# Altium PCB SolarPanelCharger.PcbDoc
Units mm, origin at the board's own origin, x right, y up, seen from the top; angles counter-clockwise.
Board outline 34.31 x 20.32 mm, 2 copper layers (Top Layer, Bottom Layer); 24 components, 17 nets, 61 pads, 39 vias.
Unrouted connection lines stored in the file: 1.
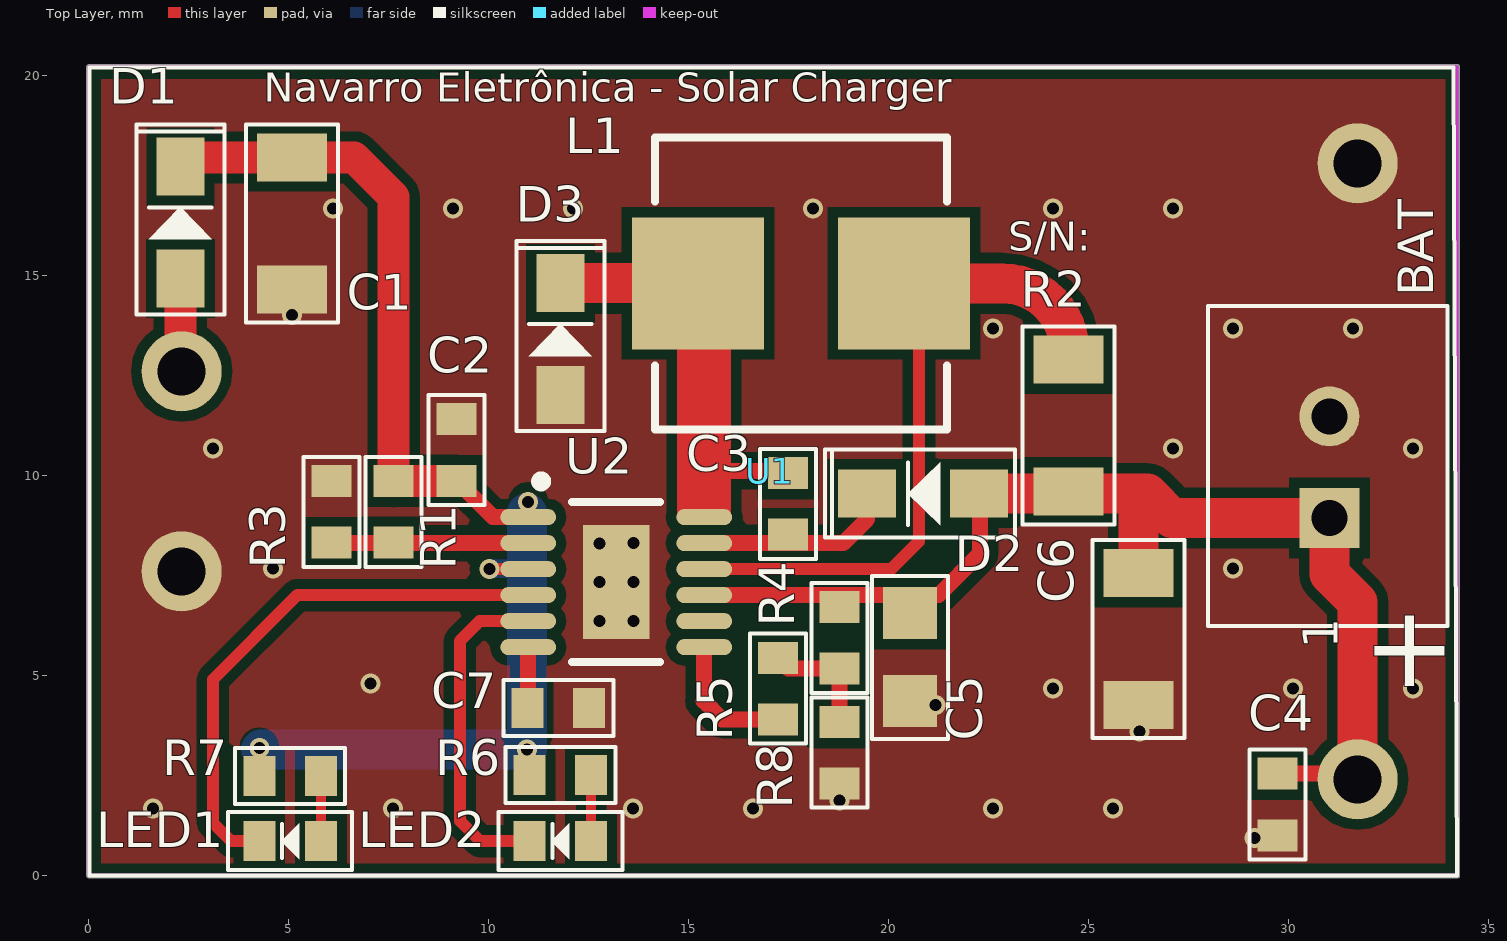
[diagram p0: Top Layer view]
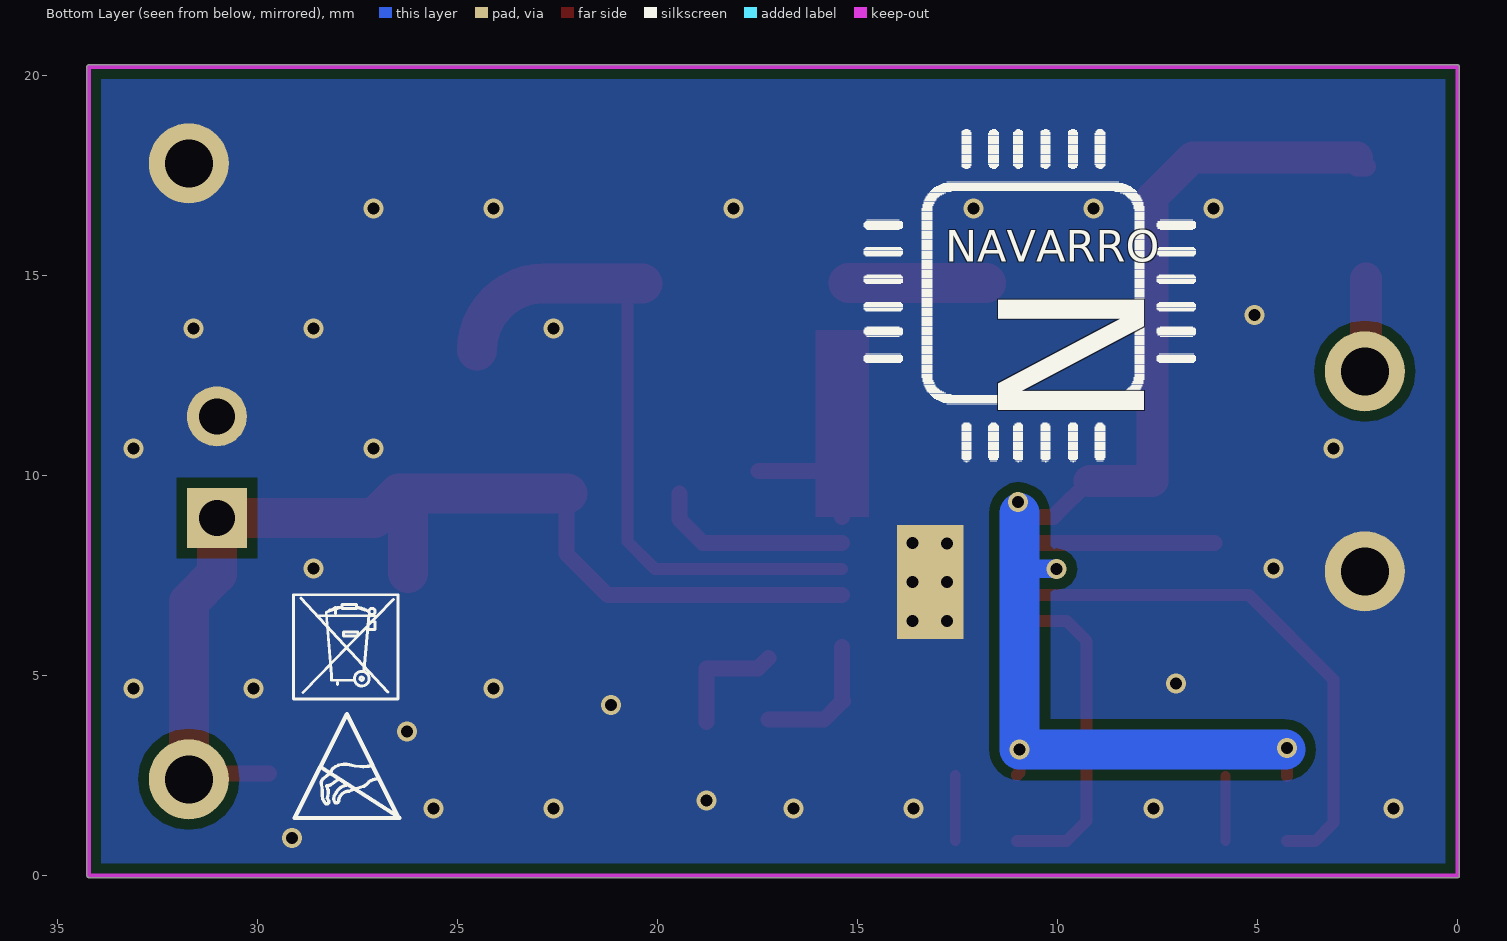
[diagram p1: Bottom Layer view, seen from below]
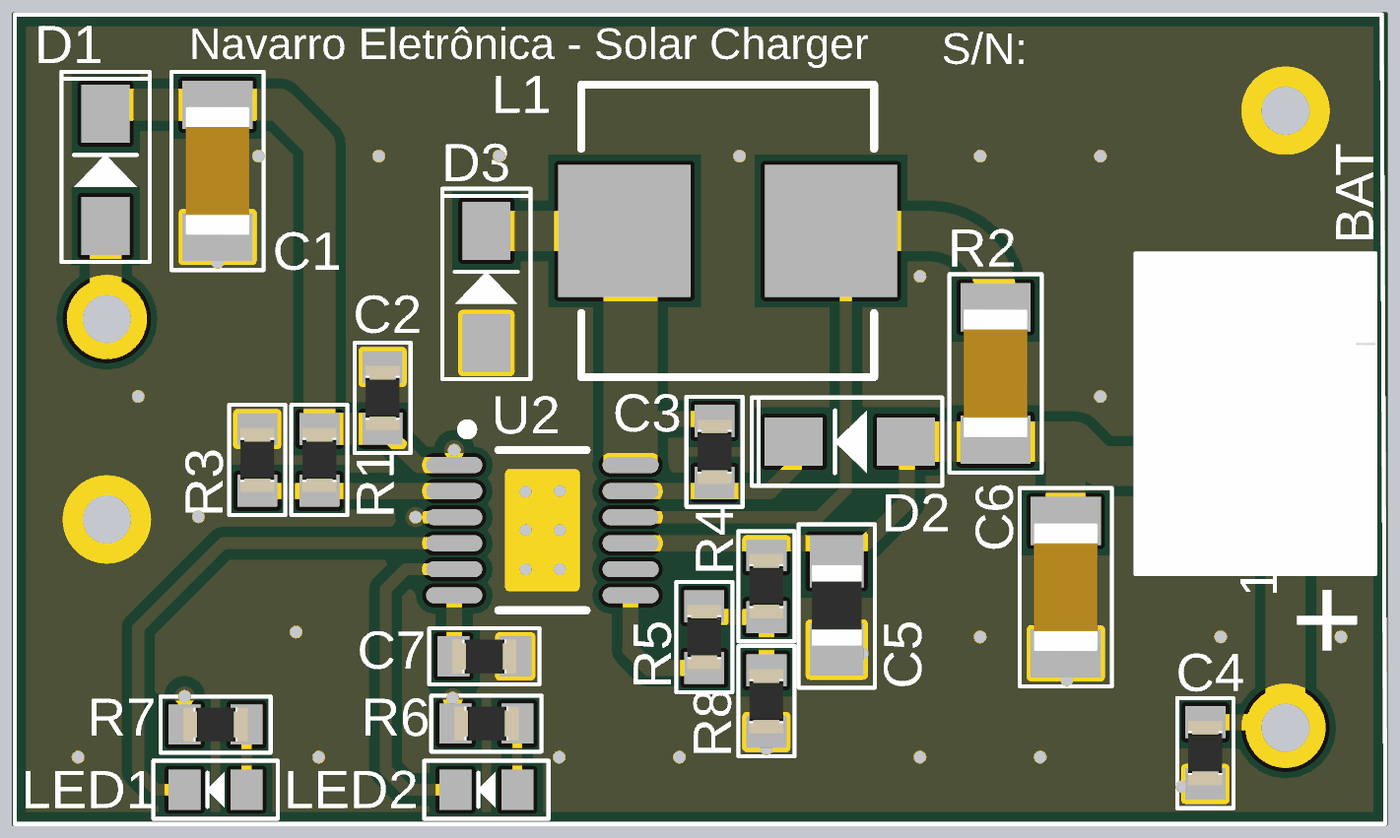
[diagram p2: 3D render of the assembled board from above, using the file's embedded part models]

## Layer stack, top to bottom
Top Solder: solder mask 0.0102, Solder Resist, Dk 3.5
Top Layer: signal copper 0.0356
Dielectric 1: dielectric 0.32, FR-4, Dk 4.8
Bottom Layer: signal copper 0.0356
Bottom Solder: solder mask 0.0102, Solder Resist, Dk 3.5

## Board outline
-0.05,0 ccw(c0,0) 0,-0.05 34.214,-0.05 ccw(c34.214,0) 34.264,0 34.264,20.218 ccw(c34.214,20.218) 34.214,20.269 0,20.269 ccw(c0,20.218) -0.05,20.218

## Design rules (kind name [scope] priority, off if disabled: settings)
Clearance [All] p1: gap=0.254
PlaneConnect [All] p1: planeconnectstyle=Direct reliefexpansion=0.508 reliefentries=4 reliefconductorwidth=0.254 reliefairgap=0.254
PolygonConnect [All] p1: connectstyle=Direct reliefconductorwidth=0.254 reliefentries=4 polygonreliefangle="90 Angle" airgapwidth=0.254
RoutingVias [All] p1: holewidth=0.711 width=1.27 viastyle="Through Hole" minholewidth=0.711 minwidth=1.27 maxholewidth=0.711 maxwidth=1.27
SolderMaskExpansion [All] p1: expansion=0.102
Width [All] p1: maxlimit=4 minlimit=0.254 preferedwidth=0.254
29 further rules are at their usual default settings.

## Components (designator, comment, footprint, x,y, rotation, side; value= is the part's Value field where it differs from the comment)
BAT "Header 2" "CONN XH2.54 - 2" 31.013,8.941 r90 top
C1 "Capacitor Cerâmico" CC1206 5.08,16.307 r90 top
C2 "Capacitor Cerâmico" CC0603 9.195,10.643 r270 top
C3 "Capacitor Cerâmico" CC0603 17.475,9.296 r90 top
C4 "Capacitor Cerâmico" CC0603 29.718,1.778 r90 top
C5 "Capacitor Cerâmico" CC0805 20.523,5.461 r90 top
C6 "Capacitor Cerâmico" CC1206 26.238,5.918 r90 top
C7 "Capacitor Cerâmico" CC0603 11.735,4.191 r180 top
D1 "MBR0520L" SOD-123F 2.286,16.332 r90 top
D2 "MBR0520L" SOD-123F 20.853,9.55 r180 top
D3 "MBR0520L" SOD-123F 11.786,13.411 r90 top
L1 "Indutor" "MURATA 4600" 17.805,14.808 r0 top
LED1 "LED" "LED 0603" 5.029,0.864 r180 top
LED2 "LED" "LED 0603" 11.786,0.864 r180 top
R1 "Resistor" CC0603 7.62,9.093 r90 top
R2 "Resistor" CC1206 24.486,11.252 r270 top
R3 "Resistor" CC0603 6.071,9.093 r270 top
R4 "Resistor" CC0603 18.771,5.944 r90 top
R5 "Resistor" CC0603 17.221,4.674 r270 top
R6 "Resistor" CC0603 11.786,2.515 r180 top
R7 "Resistor" CC0603 5.029,2.489 r180 top
R8 "Resistor" CC0603 18.771,3.073 r90 top
U1 "Hi-Link" Fonte-HILINK 17.018,10.109 r180 top locked
U2 "LT3652" MSOP-12N_EP 13.183,7.341 r0 top

## Footprints (in the part's own frame and the unit in brackets; to place one, negate y for a bottom-side part, rotate by r counter-clockwise, add the part's x,y. Pads: shape width x height; smd on the part's side, far side on the other; paste and mask are expansions set on the pad)
CC0603 [mm] "Chip Resistor, 2-Leads, Body 1,6x0,8mm, IPC Medium Density"
  rect 0.8x1 smd: 1(-0.77,0) 2(0.77,0)
  silkscreen extent -1.38,-0.7 1.38,0.7, body extent -0.8,-0.42 0.8,0.43, height 0.45
CC0805 [mm] "Chip Resistor, 2-Leads, Body 2,0x1,2mm, IPC Medium Density"
  rect 1.3x1.35 smd: 1(-1.1,0) 2(1.1,0)
  silkscreen extent -2.05,-0.95 2.02,0.95, body extent -1,-0.62 1,0.63, height 0.6
CC1206 [mm] "Chip Resistor, 2-Leads, Body 3,2x1,6mm, IPC Medium Density"
  rect 1.2x1.75 smd: 1(-1.65,0) 2(1.65,0)
  silkscreen extent -2.47,-1.15 2.47,1.15, body extent -1.6,-0.8 1.6,0.8, height 1
"CONN XH2.54 - 2" [mm] "Connector; Header; 2 Position"
  rect 1.5x1.5 hole 0.9: 1(0,0)
  round 1.5 hole 0.9: 2(2.54,0)
  silkscreen extent -2.69,-2.95 5.31,3.04, body extent -2.69,-2.95 5.31,3.05, height 7
Fonte-HILINK [mm]
  round 2 hole 1.2: 1(-14.7,7.7) 2(-14.7,-7.7) 3(14.7,-2.5) 4(14.7,2.5)
  silkscreen extent -17.19,-10.1 17,10.1
"LED 0603" [mm] "Chip Diode, 2-Leads, Body 1,6x0,8mm, IPC Medium Density"
  rect 0.8x1 smd: 1(-0.77,0) 2(0.77,0)
  silkscreen extent -1.55,-0.73 1.55,0.73, body extent -0.82,-0.43 0.82,0.43, height 0.8
MSOP-12N_EP [mm]
  oval 1.4x0.4 smd: 1(-2.2,1.625) 2(-2.2,0.975) 3(-2.2,0.325) 4(-2.2,-0.325) 5(-2.2,-0.975) 6(-2.2,-1.625) 7(2.2,-1.625) 8(2.2,-0.975) 9(2.2,-0.325) 10(2.2,0.325) 11(2.2,0.975) 12(2.2,1.625)
  rect 1.66x2.85 all layers, no hole: 13(0,0)
  silkscreen extent -2,-2 1.1,2.64, body extent -1.5,-2 1.5,2, height 0.86
"MURATA 4600" [mm] "Molded Inductor, 2-Leads, Body 7,30x7,30mm, IPC Medium Density"
  rect 3.3x3.3 smd: 1(-2.575,0) 2(2.575,0)
  silkscreen extent -3.65,-3.65 3.65,3.65, body extent -3.65,-3.65 3.65,3.65, height 4.55
SOD-123F [mm] "Molded Diode, 2-Leads, Body 2,6x1,7mm, IPC Medium Density"
  rect 1.45x1.2 smd: 1(-1.4,0) 2(1.4,0)
  silkscreen extent -2.3,-1.1 2.45,1.1, body extent -1.4,-0.95 1.4,0.95, height 1.11

## Part data
BAT: "Header, 2-Pin"
C1 C5: library part "Cap 10uF 50V 1206 X5R", "Capacitor (Semiconductor SIM Model)"
C2 C4: library part "Cap 100nF 25V 0603 X7R", "Capacitor (Semiconductor SIM Model)"
C3 C7: library part "Cap 1uF 50V 0603 X5R", "Capacitor (Semiconductor SIM Model)"
C6: library part "Cap 100uF 6.3V 1206 X5R", "Capacitor (Semiconductor SIM Model)"
D1 D2 D3: library part "DS 20V 0.5A 385mV SOD-123", "Schottky Diode"
L1: library part "Ind 68uH 1.05A", "Inductor"
R1 R3 R4 R5 R8: library part "Res - $Val $% $Footprint $Pot"
R2: library part "Res 0.22R 1% 1206 1/4W"
R6 R7: library part "Res 10K 1% 0603 1/10W"
U1: library part "Fonte Hi-Link", "Fonte chaveada isolada"
U2: "Power Tracking 2A Battery  Charger for Solar Power"

## Via types
v1: diameter 0.5, hole 0.3, Top Layer to Bottom Layer, tented both sides, 33 vias
v2: diameter 0.5, hole 0.3, Top Layer to Bottom Layer, 6 vias

## Nets (pads, with @x,y where several pads share a name; then routed paths per layer and width w, separated by ;. In a path a pad name is that pad's centre, name@x,y a point inside that pad or via, vN(x,y) a via of type N, cw(c..) or ccw(c..) an arc to the next point about the centre after c; other vN are vias at no path point)
/CHRG: LED1.2 U2.4 | length 13.7
  Top Layer w0.3: LED1.2 3.556,0.864 3.099,1.321 3.099,4.902 5.212,7.016 U2.4
/FAULT: LED2.2 U2.5 | length 8.4
  Top Layer w0.3: U2.5 9.769,6.366 9.271,5.867 9.271,1.372 9.779,0.864 LED2.2
GND: BAT.2 C1.1 C2.1 C4.1 C5.1 C6.1 C7.1 D3.1 R3.1 R8.1 U1.2 U1.4 U2.13
  other v1: 29.134,0.94 1.6,1.676 7.6,1.676 13.6,1.676 16.6,1.676 22.6,1.676 25.6,1.676 18.771,1.88 26.264,3.607 21.158,4.267 24.1,4.676 30.1,4.676 33.1,4.676 7.036,4.801 4.6,7.676 28.6,7.676 3.1,10.676 27.1,10.676 33.1,10.676 22.6,13.676 28.6,13.676 31.6,13.676 5.08,14.021 6.1,16.676 9.1,16.676 12.1,16.676 18.1,16.676 24.1,16.676 27.1,16.676
  other v2: 12.765,6.366 13.619,6.366 12.765,7.341 13.619,7.341 12.765,8.303 13.619,8.321
NetC3_1: C3.1 D2.2 U2.11 | length 5
  Top Layer w0.4: U2.11 18.857,8.316 19.454,8.913 D2.2
NetC3_2: C3.2 D3.2 L1.1 U2.12 | length 6.6
  Top Layer w0.4: U2.12 15.383,9.963 15.537,10.117 C3.2@17.475,10.117
  Top Layer w1: D3.2 L1.1@15.228,14.811
NetC7_2: C7.2 U2.6 | length 1.5
  Top Layer w0.4: C7.2@10.983,4.209 U2.6
NetD1_1: D1.1 U1.3 | length 2.3
  Top Layer w0.8: U1.3@2.286,12.641 D1.1
NetL1_2: L1.2 R2.1 U2.10 | length 17.2
  Top Layer w0.3: U2.10 20.061,7.666 20.752,8.357 L1.2@20.752,14.808
  Top Layer w1: L1.2 20.752,14.808 22.834,14.808 cw(c22.834,13.131) R2.1@24.511,13.131
NetLED1_1: LED1.1 R7.1 | length 1.6
  Top Layer w0.254: LED1.1 R7.1
NetLED2_1: LED2.1 R6.1 | length 1.7
  Top Layer w0.254: LED2.1 R6.1
NetR1_1: R1.1 R3.2 U2.2 | length 4.9
  Top Layer w0.4: R3.2@6.078,8.316 U2.2
NetR4_1: R4.1 R5.1 R8.2 | length 3
  Top Layer w0.4: R5.1 17.491,5.174 R4.1 R8.2
NetR5_2: R5.2 U2.7 | length 3.4
  Top Layer w0.4: U2.7 15.383,4.384 15.367,4.369 15.832,3.904 R5.2
NTC: U2.8
VBAT: BAT.1 C4.2 C5.2 C6.2 D2.1 R2.2 R4.2 U1.1 U2.9 | length 28.8
  Top Layer w0.4: U2.9 21.24,7.016 22.276,8.052 22.276,9.528 D2.1 ; C4.2 31.579,2.548 U1.1
  Top Layer w1: D2.1 26.467,9.551 ; C6.2 26.238,9.322 26.467,9.551 ; U1.1 31.718,6.839 31.013,7.544 BAT.1 27.076,8.941 26.467,9.551
VCC_PS: R6.2 R7.2 | length 13.9
  Top Layer w0.3: R7.2 v1(4.259,3.192) ; v1(10.947,3.15) 10.947,2.583 R6.2
  Bottom Layer w1: v1@4.302,3.15 v1(10.947,3.15) 10.947,9.068
VPS: C1.2 C2.2 D1.2 R1.2 U2.1 U2.3 | length 17.9
  Top Layer w0.3: v1(10.02,7.666) U2.3
  Top Layer w0.4: C2.2 10.05,9.017 ; 10.102,8.966 U2.1 10.983,9.337
  Top Layer w0.5: D1.2 D1.2@2.511,17.732
  Top Layer w0.8: D1.2@2.511,17.957 C1.2 6.63,17.957 7.62,16.967 R1.2 7.629,9.873 C2.2
copper on no net:
  other v1: 10.983,9.337

## Polygon pours and split planes (outlines as drawn)
GND on Top Layer "Top Layer-No Net" (solid, remove dead copper, pour order 0): 0,20.218 34.214,20.218 34.214,0 0,0
GND on Bottom Layer "Top Layer-No Net" (solid, remove dead copper, pour order 2): -0.025,20.193 34.188,20.193 34.188,-0.025 -0.025,-0.025

## Keep-outs
Keep-Out Layer:
  lines w0.1: 0,0 0,20.218 34.214,20.218 34.214,0.025 34.214,0 0,0

## Other copper
Top Layer:
  rectangle net NetC3_2: 14.707,8.966 16.053,13.64
Bottom Layer:
  rectangle net VPS: 10.008,7.442 10.77,7.899

## Silkscreen, mask and mechanical layers (free items; w line width, h text height)
Top Overlay:
  text "Navarro Eletrônica - Solar Charger" at 4.369,19.101 h1.25
  text "S/N:" at 22.987,15.367 h1.25
  text "+" at 31.852,4.064 h3.5
Bottom Overlay:
  drawing of 1078 lines, arcs and shapes, not listed
  text "NAVARRO" at 12.8,15.088 h1.34
  text "N" at 12.872,14.881 h7.24 r90

## Text inside footprints (layer, text, board x,y; h text height)
BAT: Top Overlay "1" at 31.506,5.672 h1.5 r90